# Altium PCB MB785.PCBDOC
Units mil, origin at the board's own origin, x right, y up, seen from the top; angles counter-clockwise.
Board outline 2195.55 x 3505 mil, 2 copper layers (TopLayer, BottomLayer); 22 components, 44 nets, 168 pads, 90 vias.
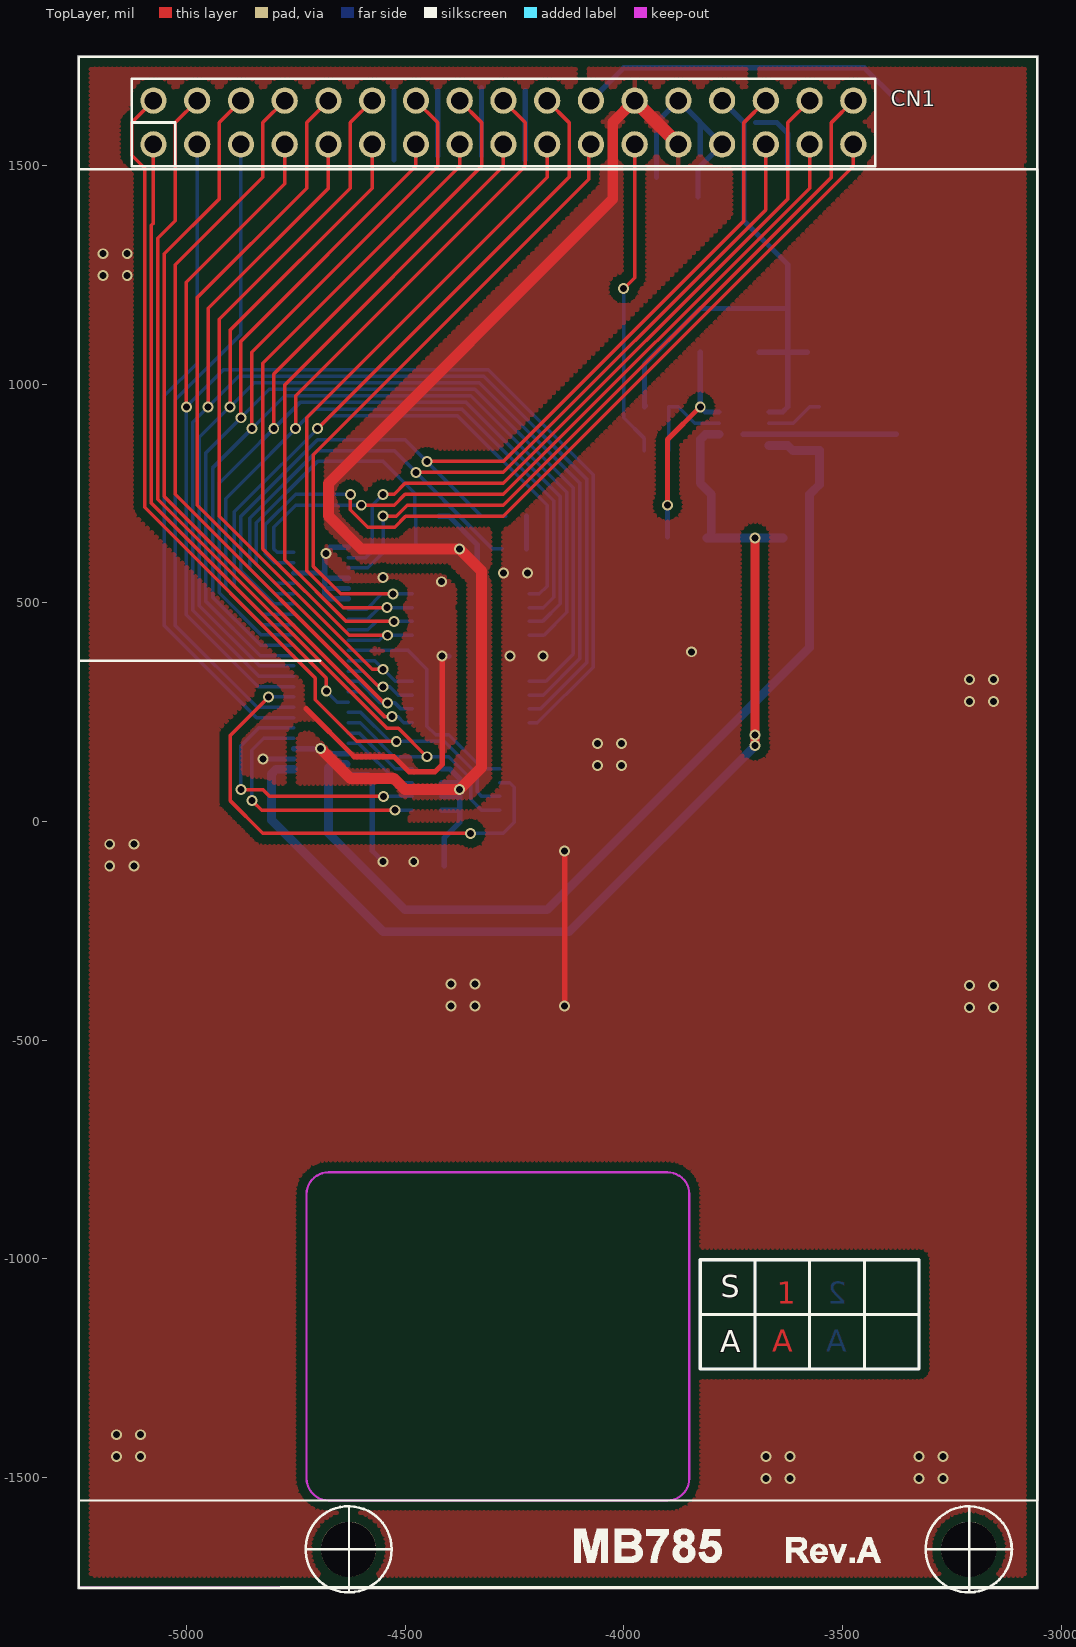
[diagram p0: TopLayer view]
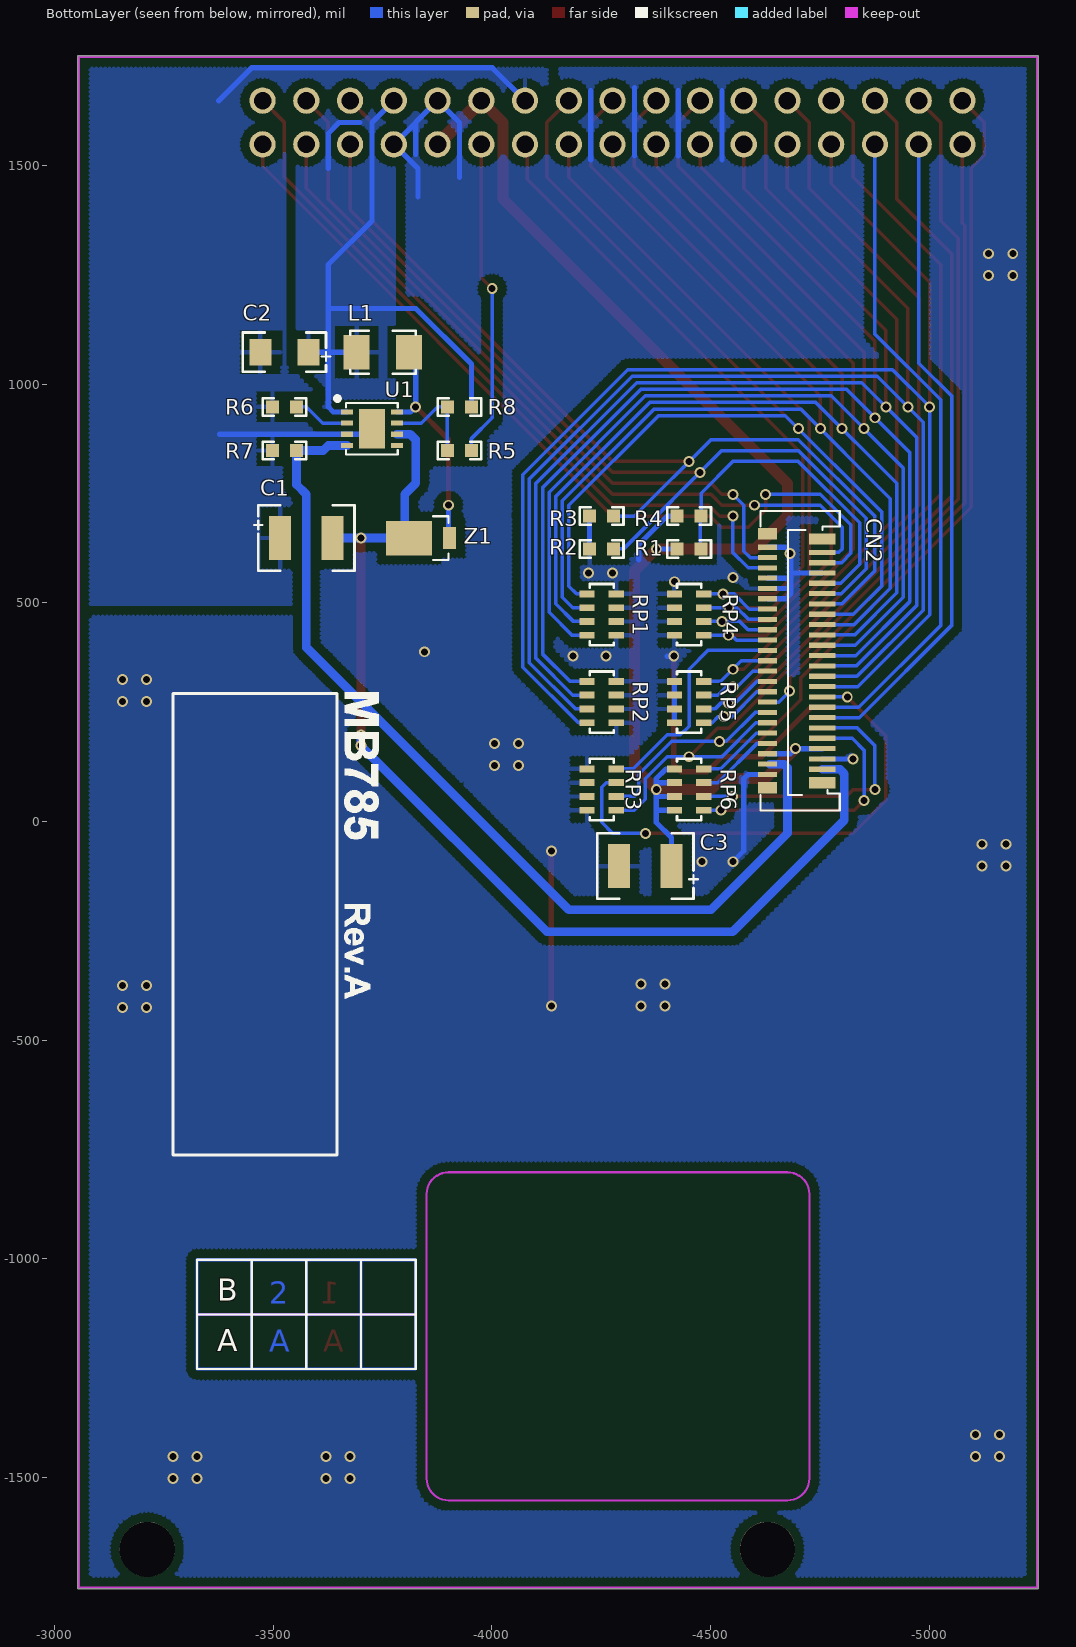
[diagram p1: BottomLayer view, seen from below]

## Layer stack, top to bottom
TopLayer: signal copper 1.4
Dielectric: core 12.6, FR-4, Dk 4.8
BottomLayer: signal copper 1.4

## Board outline
-5248.7,-1754.28 -3053.15,-1754.28 -3053.15,1750.72 -5248.7,1750.72

## Design rules (kind name [scope] priority, off if disabled: settings)
Clearance Clearance_1 [(InPoly)] p1: gap=20
Clearance [All] p2: gap=7
ComponentClearance [All] p1 off: gap=10 collisioncheckmode=0
PolygonConnect [All] p1: connectstyle=Relief reliefconductorwidth=10 reliefentries=4 polygonreliefangle="90 Angle"
RoutingLayers [All] p1: top layer=Horizontal bottom layer=Vertical
RoutingVias [All] p1: holewidth=16 width=25 viastyle="Through Hole" minholewidth=8 minwidth=16 maxholewidth=28 maxwidth=50
SolderMaskExpansion [All] p1: expansion=4
TestPointUsage [All] p1: valid=0 allowmultiple=FALSE
Testpoint [All] p1: side=15 testpointundercomponent=TRUE minsize=40 maxsize=100 preferedsize=60 minholesize=20 maxholesize=40 preferedholesize=32 testpointgrid=1 style=1023 order=1234567890
Width Width_3 [InNet('BLGND')] p1: maxlimit=300 minlimit=8 preferedwidth=12
Width Width_4 [InNet('BLVDD')] p2: maxlimit=300 minlimit=8 preferedwidth=12
Width Width_2 [InNet('VDD')] p3: maxlimit=300 minlimit=8 preferedwidth=8
Width Width_1 [InNet('GND')] p4: maxlimit=300 minlimit=8 preferedwidth=12
Width [All] p5: maxlimit=300 minlimit=7 preferedwidth=8
16 further rules are at their usual default settings.

## Components (designator, comment, footprint, x,y, rotation, side; value= is the part's Value field where it differs from the comment)
C1 "4.7uF/50V" TAN-B -3575.65,648.22 r0 bottom
C2 "2.2uF" TAN-A -3525.65,1073.22 r180 bottom
C3 "1uF/50V" TAN-B -4350.65,-101.78 r180 bottom
CN1 "3.2LCD_connector" 2*17P -5075.65,1548.22 r90 top
CN2 "FF0245SS1" FF0245SS1 -4692.54,367.51 r90 bottom locked
L1 "4.7uH(1A)" 3225 -3750.65,1073.22 r0 bottom
R1 "10K" 0603R -4450.65,623.22 r180 bottom
R2 "4K7" 0603R -4250.65,623.22 r0 bottom
R3 "4K7" 0603R -4250.65,698.22 r0 bottom
R4 "0" 0603R -4450.65,698.22 r180 bottom
R5 "0" 0603R -3925.65,848.22 r0 bottom
R6 "100K" 0603R -3525.65,948.22 r180 bottom
R7 "10" 0603R -3525.65,848.22 r0 bottom
R8 "do not fit" 0603R -3925.65,948.22 r0 bottom
RP1 "10K" RES4B#1 -4250.65,473.22 r270 bottom
RP2 "10K" RES4B#1 -4250.65,273.22 r270 bottom
RP3 "10K" RES4B#2 -4250.65,73.22 r270 bottom
RP4 "10K" RES4B#2 -4450.65,473.22 r270 bottom
RP5 "10K" RES4B#1 -4450.65,273.22 r90 bottom
RP6 "10K" RES4B#1 -4450.65,73.22 r90 bottom
U1 "STLD40DPMR" QFNT8 -3725.65,898.22 r270 bottom
Z1 "STPS1L40M" DO216AA -3875.65,648.22 r180 bottom

## Footprints (in the part's own frame and the unit in brackets; to place one, negate y for a bottom-side part, rotate by r counter-clockwise, add the part's x,y. Pads: shape width x height; smd on the part's side, far side on the other; paste and mask are expansions set on the pad)
2*17P [mil]
  round 60 hole 40: 1(0,0) 2(100,0) 3(0,-100) 4(100,-100) 5(0,-200) 6(100,-200) 7(0,-300) 8(100,-300) 9(0,-400) 10(100,-400) 11(0,-500) 12(100,-500) 13(0,-600) 14(100,-600) 15(0,-700) 16(100,-700) 17(0,-800) 18(100,-800) 19(0,-900) 20(100,-900) 21(0,-1000) 22(100,-1000) 23(0,-1100) 24(100,-1100) 25(0,-1200) 26(100,-1200) 27(0,-1300) 28(100,-1300) 29(0,-1400) 30(100,-1400) 31(0,-1500) 32(100,-1500) 33(0,-1600) 34(100,-1600)
  silkscreen extent -50,-1650 150,50
0603R [mil]
  rect 30x30 smd: 1(27.5,0) 2(-27.5,0)
  silkscreen extent -50,-20 50,20
3225 [mm]
  rect 1.5x2 smd: 1(1.524,0) 2(-1.524,0)
  silkscreen extent -1.91,-1.25 1.91,1.25
DO216AA [mil]
  rect 30x50 smd: 1(27.5,0)
  rect 105.12x78.74 smd: 2(-65.06,0)
  silkscreen extent -10,-50 25,50
FF0245SS1 [mm]
  rect 0.65x1.1 smd: 0(-7.375,1.59) 0(7.375,1.59)
  rect 0.65x1.54 smd: 0(-7.075,-1.59) 0(7.075,-1.59)
  rect 0.3x1.1 smd: 1(6.6,1.59) 3(6,1.59) 5(5.4,1.59) 7(4.8,1.59) 9(4.2,1.59) 11(3.6,1.59) 13(3,1.59) 15(2.4,1.59) 17(1.8,1.59) 19(1.2,1.59) 21(0.6,1.59) 23(0,1.59) 25(-0.6,1.59) 27(-1.2,1.59) 29(-1.8,1.59) 31(-2.4,1.59) 33(-3,1.59) 35(-3.6,1.59) 37(-4.2,1.59) 39(-4.8,1.59) 41(-5.4,1.59) 43(-6,1.59) 45(-6.6,1.59)
  rect 0.3x1.54 smd: 2(6.3,-1.59) 4(5.7,-1.59) 6(5.1,-1.59) 8(4.5,-1.59) 10(3.9,-1.59) 12(3.3,-1.59) 14(2.7,-1.59) 16(2.1,-1.59) 18(1.5,-1.59) 20(0.9,-1.59) 22(0.3,-1.59) 24(-0.3,-1.59) 26(-0.9,-1.59) 28(-1.5,-1.59) 30(-2.1,-1.59) 32(-2.7,-1.59) 34(-3.3,-1.59) 36(-3.9,-1.59) 38(-4.5,-1.59) 40(-5.1,-1.59) 42(-5.7,-1.59) 44(-6.3,-1.59)
  silkscreen extent -8.7,-2.6 8.7,2
QFNT8 [mm]
  rect 0.3x0.7 smd: 1(-0.975,-1.45) 2(-0.325,-1.45) 3(0.325,-1.45) 4(0.975,-1.45) 5(0.975,1.45) 6(0.325,1.45) 7(-0.325,1.45) 8(-0.975,1.45)
  rect 2.3x1.5 smd: ""(0,0)
  silkscreen extent -1.88,-2.13 1.5,1.5
RES4B#1 [mil]
  rect 15.75x35 smd: 1(-47.24,-33.5) 2(-47.24,33.5) 3(-15.75,-33.5) 4(-15.75,33.5) 5(15.75,-33.5) 6(15.75,33.5) 7(47.24,-33.5) 8(47.24,33.5)
  silkscreen extent -70,-28 70,28
RES4B#2 [mil]
  rect 15.75x35 smd: 1(-47.24,33.5) 2(-47.24,-33.5) 3(-15.75,33.5) 4(-15.75,-33.5) 5(15.75,33.5) 6(15.75,-33.5) 7(47.24,33.5) 8(47.24,-33.5)
  silkscreen extent -70,-28 70,28
TAN-A [mil]
  rect 50x60 smd: 1(55,0) 2(-55,0)
  silkscreen extent -95,-45 105,45
TAN-B [mil]
  rect 50x100 smd: 1(60,0) 2(-60,0)
  silkscreen extent -110,-75 120,75

## Free pads (board coordinates)
  round 125.98 hole 125.98 unplated: 0(-4629.65,-1663.72) 0(-3211.94,-1663.72)

## Via types
v1: diameter 25, hole 16, TopLayer to BottomLayer, tented both sides, 90 vias

## Nets (pads, with @x,y where several pads share a name; then routed paths per layer and width w, separated by ;. In a path a pad name is that pad's centre, name@x,y a point inside that pad or via, vN(x,y) a via of type N, cw(c..) or ccw(c..) an arc to the next point about the centre after c; other vN are vias at no path point)
#RESET: CN1.5 CN2.32 | length 1510.1
  BottomLayer w8: CN1.5 -4875.65,1114.23 -5025.65,964.23 -5025.65,448.22 -4838.65,261.21 CN2.32
A: C1.2 CN2.44 U1.6 Z1.2 | length 2505.3
  TopLayer w20: v1@-3700.65,174.09 v1(-3700.65,648.22)
  BottomLayer w12: v1(-3700.65,198.22) v1@-3700.22,197.78
  BottomLayer w20: CN2.44 -4795.65,119.48 -4805.65,109.48 -4805.65,3.22 -4550.65,-251.78 -4125.65,-251.78 v1(-3700.22,173.66) v1@-3700.22,197.78 ; Z1.2 C1.2 ; Z1.2@-3800.65,648.22 -3800.65,748.22 -3825.65,773.22 -3825.65,873.22 -3813.45,885.43 U1.6
BL_CONTROL: CN1.23 R5.2 | length 730
  TopLayer w8: v1(-4000.65,1218.22) -3975.65,1243.22 CN1.23
  BottomLayer w8: v1(-4000.65,1218.22) -4000.65,923.22 -3953.15,875.72 R5.2
BLGND: C1.1 C2.2 CN1.22 R6.2 R7.1 U1. U1.3 | length 1112.1
  BottomLayer w12: CN1.22 -4000.65,1723.22 -3450.65,1723.22 -3375.65,1648.22 ; U1.@-3727.86,885.43 -3377.86,885.43
BLVDD: C2.1 CN1.28 L1.1 R8.2 U1.1 | length 1564.5
  BottomLayer w12: R8.2@-3950.65,950.72 R8.2 -3953.15,1045.72 -3825.65,1173.22 -3625.65,1173.22 ; CN1.28 -3725.65,1598.22 -3725.65,1373.22 -3625.65,1273.22 -3625.65,948.22 -3637.27,936.61 U1.1 ; -3698.57,1598.22 -3650.65,1598.22 -3625.65,1573.22 -3625.65,1493.22 ; L1.1 C2.1
CS: CN1.1 CN2.31 | length 1478.9
  TopLayer w8: CN1.1 -5075.65,1368.22 -5080.65,1363.22 -5080.65,728.22 -4680.65,328.22 v1(-4680.65,298.22)
  BottomLayer w8: v1(-4680.65,298.22) -4655.46,273.02 CN2.31
DOTCLK: CN2.38 RP6.1 | length 601.4
  TopLayer w8: v1(-4850.65,48.22) -4828.41,25.98 v1(-4523.41,25.98) v1@-4526.16,23.22
  BottomLayer w8: v1(-4850.65,48.22) -4850.65,163.22 -4823.53,190.35 CN2.38 ; v1(-4523.41,25.98) RP6.1
ENABLE: CN2.39 RP6.5 | length 182.9
  BottomLayer w8: CN2.39 -4605.97,178.54 -4516.4,88.97 RP6.5
GND: C3.2 CN1.26 CN1.27 CN2.1 CN2.6 CN2.7 CN2.9 CN2.11 CN2.42 CN2.45 R2.1 R3.1 R4.2 RP1.2 RP1.4 RP1.6 RP1.8 RP2.2 RP2.4 RP2.6 RP2.8 RP3.2 RP3.4 RP3.6 RP3.8 RP4.2 RP4.4 RP4.6 RP4.8 RP5.2 RP5.4 RP5.6 RP5.8 | length 3208.8
  TopLayer w12: -4726.67,258.22 -4616.67,148.22 -4525.65,148.22 -4491.28,113.85 -4432.07,113.85 -4415.65,130.27 v1(-4415.65,378.22) ; v1(-4681.65,613.22) v1@-4675.65,613.22 ; v1(-4135.65,-421.78) v1(-4135.65,-66.78)
  BottomLayer w12: v1(-4825.65,143.22) -4825.54,143.1 CN2.42 ; CN2.6 -4684,568.3 -4683.92,568.22 ; -4683.92,556.49 CN2.7 ; -4678.57,532.87 CN2.9 ; CN2.45 -4585.1,107.67 -4575.65,98.22 -4575.65,-66.78 v1(-4550.65,-91.78) ; CN2.11 -4671.68,509.24 -4683.92,521.49 -4683.92,614.97 -4671.53,627.35 CN2.1 ; -4525.65,1513.22 -4525.65,1671.13 ; -4425.65,1522.12 -4425.65,1671.13 ; R4.2 -4400.65,698.22 -4335.65,633.22 -4335.65,598.22 ; RP5.2 RP5.8 ; v1(-4415.65,378.22) -4400.65,378.22 ; -4325.65,1522.12 -4325.65,1678.22 ; -4225.65,1513.22 -4225.65,1671.13 ; R2.1 R3.1 ; -3925.65,1473.22 -3925.65,1598.22 CN1.26 CN1.27 -3830.65,1493.22 -3830.65,1428.22 ; -3825.65,1525.31 -3825.65,1598.22
  other v1: -3675.65,-1501.78 -3620.65,-1501.78 -3325.65,-1501.78 -3270.65,-1501.78 -5160.65,-1451.78 -5105.65,-1451.78 -3675.65,-1451.78 -3620.65,-1451.78 -3325.65,-1451.78 -3270.65,-1451.78 -5160.65,-1401.78 -5105.65,-1401.78 -3210,-425 -3155,-425 -4395.65,-421.78 -4340.65,-421.78 -3210,-375 -3155,-375 -4395.65,-371.78 -4340.65,-371.78 -5175.65,-101.78 -5120.65,-101.78 -4480.65,-91.78 -5175.65,-51.78 -5120.65,-51.78 -4060.65,128.22 -4005.65,128.22 -4060.65,178.22 -4005.65,178.22 -3210,275 -3155,275 -3210,325 -3155,325 -4260.65,378.22 -4185.65,378.22 -3845.65,388.22 -4417.15,548.34 -4550.65,558.22 -4275.65,568.22 -4220.65,568.22 -5190.65,1248.22 -5135.65,1248.22 -5190.65,1298.22 -5135.65,1298.22
HSYNC: CN2.37 RP6.7 | length 179.6
  BottomLayer w8: CN2.37 -4604.59,202.16 -4522.9,120.46 RP6.7
K: CN2.43 R7.2 U1.4 | length 2193.9
  BottomLayer w20: CN2.43@-4635.65,131.29 -4667.58,131.29 -4675.65,123.22 -4675.65,-26.78 -4500.65,-201.78 -4175.65,-201.78 -3575.65,398.22 -3575.65,748.22 -3553.15,770.72 R7.2 -3614.04,848.22 -3625.65,859.84 U1.4
NetCN2_8: CN2.8 R1.1 R4.1 | length 774.1
  BottomLayer w8: CN2.8 -4797.11,544.68 -4840.65,588.22 -4840.65,683.22 -4700.65,823.22 -4550.65,823.22 -4478.15,750.72 R4.1 ; R1.1@-4475.65,625.72 R4.1@-4475.65,698.22
NetL1_2: L1.2 U1.8 Z1.1 | length 504.8
  TopLayer w12: v1(-3900.65,723.22) -3900.65,873.22 v1(-3825.65,948.22)
  BottomLayer w12: v1@-3903.15,720.72 v1(-3900.65,723.22) Z1.1@-3900.65,650.72 ; L1.2@-3825.65,1073.22 v1(-3825.65,948.22) -3814.04,936.61 U1.8
NetR5_1: R5.1 R8.1 U1.7 | length 230.8
  BottomLayer w8: R5.1 R8.1 -3875.65,948.22 -3838.45,911.02 U1.7
NetR6_1: R6.1 U1.2 | length 130.8
  BottomLayer w8: U1.2 -3612.86,911.02 -3575.65,948.22 R6.1
PD0: CN2.30 RP3.3 | length 1139.7
  TopLayer w8: v1(-4812.27,284.84) -4900.65,196.45 -4900.65,48.22 -4825.65,-26.78 v1(-4350.65,-26.78)
  BottomLayer w8: v1(-4812.27,284.84) CN2.30 ; v1(-4350.65,-26.78) -4275.65,-26.78 -4250.65,-1.78 -4250.65,78.22 -4261.4,88.97 RP3.3
PD1: CN1.6 CN2.29 RP5.1 | length 1880.9
  TopLayer w8: CN1.6 -4925.65,1598.22 -4925.65,1423.22 -5050.65,1298.22 -5050.65,743.22 -4547.65,240.22 v1(-4530.65,240.22)
  BottomLayer w8: CN2.29 -4605.65,296.65 -4549.23,240.22 -4517.65,240.22 -4503.41,225.98 RP5.1
PD2: CN1.7 CN2.28 RP2.7 | length 3186.1
  TopLayer w8: v1(-5000.65,948.22) -5000.65,1233.22 -4775.65,1458.22 CN1.7
  BottomLayer w8: CN2.28@-4755.38,308.22 CN2.28 -4835.89,308.46 -5000.65,473.22 v1(-5000.65,948.22) -4915.65,1033.22 -4310.65,1033.22 -4070.65,793.22 -4070.65,353.22 -4197.9,225.98 RP2.7
PD3: CN1.8 CN2.27 RP5.3 | length 1857.9
  TopLayer w8: CN1.8 -4825.65,1598.22 -4825.65,1473.22 -5025.65,1273.22 -5025.65,748.22 -4548.65,271.22 v1(-4540.65,271.22)
  BottomLayer w8: CN2.27 -4605.65,320.27 -4556.61,271.22 -4523.65,271.22 -4509.9,257.47 RP5.3
PD4: CN1.9 CN2.26 RP2.5 | length 3073.2
  TopLayer w8: v1(-4950.65,948.22) -4950.65,1173.22 -4675.65,1448.22 CN1.9
  BottomLayer w8: CN2.26 -4834.51,332.08 -4985.65,483.22 -4985.65,913.22 -4880.65,1018.22 -4320.65,1018.22 -4085.65,783.22 -4085.65,363.22 -4191.4,257.47 RP2.5
PD5: CN1.10 CN2.25 RP5.5 | length 1814.7
  TopLayer w8: CN1.10 -4725.65,1598.22 -4725.65,1448.22 -4975.65,1198.22 -4975.65,723.22 -4560.65,308.22 v1(-4550.65,308.22)
  BottomLayer w8: CN2.25 -4596.32,343.89 -4560.65,308.22 -4535.65,308.22 -4516.4,288.97 RP5.5
PD6: CN1.11 CN2.24 RP2.3 | length 2960.5
  TopLayer w8: v1(-4900.65,948.22) -4900.65,1123.22 -4575.65,1448.22 CN1.11
  BottomLayer w8: CN2.24 -4833.13,355.7 -4970.65,493.22 -4970.65,878.22 -4845.65,1003.22 -4330.65,1003.22 -4100.65,773.22 -4100.65,373.22 -4184.9,288.97 RP2.3
PD7: CN1.12 CN2.23 RP5.7 | length 1780.2
  TopLayer w8: CN1.12 -4625.65,1598.22 -4625.65,1448.22 -4925.65,1148.22 -4925.65,698.22 -4575.65,348.22 v1(-4550.65,348.22)
  BottomLayer w8: CN2.23 -4569.94,367.51 -4522.9,320.46 RP5.7
PD8: CN1.13 CN2.22 RP2.1 | length 2883.3
  TopLayer w8: v1(-4875.65,923.22) -4875.65,1098.22 -4475.65,1498.22 CN1.13
  BottomLayer w8: CN2.22 -4831.76,379.32 -4955.65,503.22 -4955.65,843.22 -4810.65,988.22 -4340.65,988.22 -4115.65,763.22 -4115.65,383.22 -4178.41,320.47 RP2.1
PD9: CN2.21 RP3.1 | length 534.1
  BottomLayer w8: CN2.21 -4493.57,391.13 -4450.65,348.22 -4450.65,218.22 -4430.65,198.22 -4400.65,198.22 -4322.9,120.47 RP3.1
PD10: CN1.14 CN2.20 RP1.7 | length 2825.9
  TopLayer w8: v1(-4850.65,898.22) -4850.65,1073.22 -4425.65,1498.22 -4425.65,1598.22 CN1.14
  BottomLayer w8: CN2.20@-4755.42,403.22 CN2.20 -4830.38,402.95 -4940.65,513.22 -4940.65,808.22 -4775.65,973.22 -4350.65,973.22 -4130.65,753.22 -4130.65,478.22 -4182.9,425.98 RP1.7
PD11: CN1.15 CN2.19 RP4.7 | length 1628.5
  TopLayer w8: v1(-4540.65,425.98) -4628.41,425.98 -4825.65,623.22 -4825.65,1048.22 -4375.65,1498.22 CN1.15
  BottomLayer w8: CN2.19 -4559.12,414.76 -4547.9,425.98 RP4.7
PD12: CN1.16 CN2.18 RP1.5 | length 2707.1
  TopLayer w8: v1(-4800.65,898.22) -4800.65,1023.22 -4325.65,1498.22 -4325.65,1598.22 CN1.16
  BottomLayer w8: CN2.18 -4829,426.57 -4925.65,523.22 -4925.65,773.22 -4740.65,958.22 -4360.65,958.22 -4145.65,743.22 -4145.65,498.22 -4186.4,457.47 RP1.5
PD13: CN1.17 CN2.17 RP4.5 | length 1619.1
  TopLayer w8: v1(-4525.65,457.47) -4634.91,457.47 -4775.65,598.22 -4775.65,998.22 -4275.65,1498.22 CN1.17
  BottomLayer w8: CN2.17 -4585.5,438.38 -4566.4,457.47 RP4.5
PD14: CN1.18 CN2.16 RP1.3 | length 2591.5
  TopLayer w8: v1(-4750.65,898.22) -4750.65,973.22 -4225.65,1498.22 -4225.65,1598.22 CN1.18
  BottomLayer w8: CN2.16 -4827.62,450.19 -4910.65,533.22 -4910.65,738.22 -4705.65,943.22 -4370.65,943.22 -4160.65,733.22 -4160.65,513.22 -4184.9,488.97 RP1.3
PD15: CN1.19 CN2.15 RP4.3 | length 1578.9
  TopLayer w8: v1(-4541.4,488.97) -4641.4,488.97 -4725.65,573.22 -4725.65,923.22 -4175.65,1473.22 CN1.19
  BottomLayer w8: CN2.15 -4586.87,462 -4559.9,488.97 RP4.3
PD16: CN1.20 CN2.14 RP1.1 | length 2466
  TopLayer w8: v1(-4700.65,898.22) -4125.65,1473.22 -4125.65,1598.22 CN1.20
  BottomLayer w8: CN2.14 -4826.24,473.81 -4890.65,538.22 -4890.65,708.22 -4670.65,928.22 -4380.65,928.22 -4175.65,723.22 -4175.65,538.22 -4193.41,520.47 RP1.1
PD17: CN1.21 CN2.13 RP4.1 | length 1608.8
  TopLayer w8: v1@-4530.65,523.22 v1(-4527.9,520.47) -4647.9,520.47 -4710.65,583.22 -4710.65,838.22 -4080.65,1468.22 CN1.21@-4080.65,1558.22
  BottomLayer w8: CN2.13 -4588.25,485.62 -4553.41,520.47 RP4.1
RD: CN1.4 CN2.35 RP3.7 | length 2263.8
  TopLayer w8: CN1.4 -5025.65,1598.22 -5025.65,1373.22 -5065.65,1333.22 -5065.65,737.01 -4541.87,213.22 -4515.65,213.22 v1(-4450.65,148.22)
  BottomLayer w8: CN2.35 -4603.21,225.78 -4526.04,148.61 -4451.04,148.61 v1(-4450.65,148.22) ; v1@-4450.65,148.61 -4401.04,148.61 -4350.65,98.22 -4350.65,50.98 -4325.65,25.98 RP3.7
RS: CN1.2 CN2.33 RP3.5 | length 2237.8
  TopLayer w8: CN1.2 -5125.65,1598.22 -5125.65,1523.22 -5095.65,1493.22 -5095.65,718.22 -4705.65,328.22 -4705.65,278.22 -4610.65,183.22 v1(-4520.65,183.22)
  BottomLayer w8: CN2.33 -4601.83,249.4 -4535.65,183.22 -4410.65,183.22 -4335.65,108.22 -4335.65,68.22 -4324.91,57.47 RP3.5
SDI: CN1.30 CN2.12 R3.2 | length 2275.4
  TopLayer w8: v1(-4450.65,823.22) -4275.65,823.22 -3725.65,1373.22 -3725.65,1598.22 CN1.30
  BottomLayer w8: CN2.12 -4799.87,497.43 -4875.65,573.22 -4875.65,698.22 -4700.65,873.22 -4500.65,873.22 -4325.65,698.22 R3.2@-4270.65,698.22
SDO: CN1.29 CN2.10 R2.2 | length 2172.6
  TopLayer w8: v1(-4475.65,798.22) -4275.65,798.22 -3675.65,1398.22 CN1.29
  BottomLayer w8: CN2.10 -4798.49,521.06 -4855.65,578.22 -4855.65,693.22 -4700.65,848.22 -4525.65,848.22 -4300.65,623.22 R2.2
VDD: C3.1 CN1.24 CN1.25 CN2.40 CN2.41 R1.2 RP6.2 RP6.4 RP6.6 RP6.8 | length 3224.7
  TopLayer w25: v1(-4694.16,166.72) -4625.65,98.22 -4525.65,98.22 -4500.65,73.22 v1(-4375.65,73.22) -4325.65,123.22 -4325.65,573.22 v1(-4375.65,623.22) -4600.65,623.22 -4675.65,698.22 -4675.65,773.22 -4025.65,1423.22 -4025.65,1598.22 CN1.24
  TopLayer w30: CN1.24 CN1.25
  BottomLayer w12: CN2.40 v1(-4694.16,166.72) -4682.35,154.91 CN2.41 ; R1.2 v1(-4375.65,623.22) ; RP6.2 -4377.9,25.98 ; RP6.4 -4376.4,57.47 ; RP6.6 -4376.4,88.97 ; RP6.8 -4397.9,120.46 -4375.65,98.22 -4375.65,-1.78 -4410.65,-36.78 C3.1
VSYNC: CN2.36 RP6.3 | length 635.4
  TopLayer w8: v1(-4875.65,73.22) -4825.65,73.22 -4809.9,57.47 v1(-4549.9,57.47)
  BottomLayer w8: v1(-4875.65,73.22) -4875.65,173.22 -4834.9,213.97 CN2.36 ; v1(-4549.9,57.47) RP6.3
WR: CN1.3 CN2.34 | length 1513.8
  BottomLayer w8: CN1.3 -4975.65,1048.22 -5050.65,973.22 -5050.65,448.22 -4840.02,237.59 CN2.34
XL: CN1.31 CN2.2 | length 1744.7
  TopLayer w8: v1(-4600.65,723.22) -4525.65,723.22 -4500.65,748.22 -4275.65,748.22 -3575.65,1448.22 CN1.31
  BottomLayer w8: CN2.2 -4792.98,615.54 -4800.65,623.22 -4800.65,673.22 -4750.65,723.22 v1(-4600.65,723.22)
XR: CN1.32 CN2.3 | length 1651.7
  TopLayer w8: v1(-4550.65,748.22) -4525.65,748.22 -4500.65,773.22 -4275.65,773.22 -3625.65,1423.22 -3625.65,1598.22 CN1.32
  BottomLayer w8: CN2.3@-4630.46,603.22 CN2.3 -4590.14,603.73 -4575.65,618.22 -4575.65,723.22 v1(-4550.65,748.22)
YD: CN1.33 CN2.4 | length 1956.6
  TopLayer w8: v1(-4625.65,748.22) -4625.65,713.22 -4585.65,673.22 -4524.44,673.22 -4499.44,698.22 -4275.65,698.22 -3475.65,1498.22 CN1.33
  BottomLayer w8: CN2.4 -4799.35,591.92 -4820.65,613.22 -4820.65,678.22 -4750.65,748.22 v1(-4625.65,748.22)
YU: CN1.34 CN2.5 | length 1718.6
  TopLayer w8: v1(-4550.65,698.22) -4520.65,698.22 -4495.65,723.22 -4275.65,723.22 -3525.65,1473.22 -3525.65,1598.22 CN1.34
  BottomLayer w8: CN2.5 -4585.65,580.11 -4550.65,615.11 v1(-4550.65,698.22)
pads on no net: CN2.0 U1.5
copper on no net: | length 5515
  TopLayer w5: -3825.65,-1236.78 -3825.65,-1251.78 ; -3825.65,-1126.78 -3325.65,-1126.78 ; -3700.65,-1251.78 -3700.65,-1226.78 -3700.65,-1001.78 ; -3575.65,-1251.78 -3575.65,-1001.78 ; -3450.65,-1251.78 -3450.65,-1001.78 ; -3825.65,-1251.78 -3325.65,-1251.78 -3325.65,-1226.78 -3325.65,-1001.78 -3700.65,-1001.78 ; -3825.65,-1251.78 -3825.65,-1226.78 -3825.65,-1001.78 -3700.65,-1001.78
  BottomLayer w7: -3825.65,-1126.78 -3700.65,-1126.78 ; -3700.65,-1251.78 -3700.65,-1126.78 ; -3575.65,-1251.78 -3575.65,-1126.78 -3575.65,-1001.78 ; -3450.65,-1251.78 -3450.65,-1126.78 -3450.65,-1001.78 ; -3700.65,-1126.78 -3325.65,-1126.78 ; -3700.65,-1126.78 -3700.65,-1001.78 ; -3700.65,-1001.78 -3325.65,-1001.78 -3325.65,-1126.78 ; -3700.65,-1001.78 -3825.65,-1001.78 -3825.65,-1251.78 -3325.65,-1251.78 -3325.65,-1126.78

## Polygon pours and split planes (outlines as drawn)
GND on TopLayer (hatched 90Degree grid 10 track 10, remove dead copper): -5246.2,-1751.78 -5246.2,1748.22 -3055.65,1748.22 -3055.65,-1751.78
VDD on TopLayer (hatched 90Degree grid 10 track 10, remove dead copper): -4745.65,73.22 -4745.65,193.22 -4735.65,203.22 -4695.65,203.22 -4620.65,128.22 -4400.65,128.22 -4355.65,173.22 -4355.65,548.22 -4400.65,593.22 -4600.65,593.22 -4700.65,693.22 -4700.65,838.22 -4080.65,1458.22 -4080.65,1743.22 -3720.65,1743.22 -3720.65,1398.22 -4305.65,813.22 -4305.65,98.22 -4350.65,53.22 -4725.65,53.22
GND on BottomLayer (hatched 90Degree grid 10 track 10, remove dead copper): -5245.65,-1751.78 -5245.65,1748.22 -3055.65,1748.22 -3055.65,-1751.78
BLVDD on BottomLayer (hatched 90Degree grid 10 track 10, remove dead copper): -3535.65,998.22 -3535.65,1698.22 -3825.65,1698.22 -3825.65,1598.22 -3775.65,1548.22 -3775.65,923.22 -3575.65,923.22 -3535.65,963.22
BLGND on BottomLayer (hatched 90Degree grid 10 track 10, remove dead copper): -3600.65,598.22 -3600.65,973.22 -3525.65,1048.22 -3525.65,1673.22 -3980.65,1673.22 -3980.65,1598.22 -4125.65,1598.22 -4125.65,1748.22 -3055.65,1748.22 -3055.65,498.22 -3600.65,498.22

## Keep-outs
KeepOutLayer:
  lines w4: -3825.65,-1126.78 -3700.65,-1126.78 ; -3575.65,-1251.78 -3575.65,-1126.78 -3575.65,-1001.78 ; -3450.65,-1251.78 -3450.65,-1126.78 -3450.65,-1001.78 ; -3700.65,-1251.78 -3700.65,-1126.78 ; -3700.65,-1251.78 -3325.65,-1251.78 -3325.65,-1126.78 ; -3700.65,-1251.78 -3825.65,-1251.78 -3825.65,-1001.78 -3700.65,-1001.78 ; -3700.65,-1126.78 -3325.65,-1126.78 ; -3700.65,-1126.78 -3700.65,-1001.78 ; -3700.65,-1001.78 -3325.65,-1001.78 -3325.65,-1126.78
  lines w5: -4785.94,-1751.78 -3055.65,-1751.78 ; -3055.65,1553.31 -3055.65,-1751.78 ; -3055.65,-1751.78 -3055.65,1748.22 -5246.2,1748.22 -5246.2,-1751.78 -3055.65,-1751.78 ; -4725.65,-1501.78 ccw(c-4675.65,-1501.78) -4675.65,-1551.78 -3900.65,-1551.78 ccw(c-3900.65,-1501.78) -3850.65,-1501.78 -3850.65,-851.78 ccw(c-3900.65,-851.78) -3900.65,-801.78 -4675.65,-801.78 ccw(c-4675.65,-851.78) -4725.65,-851.78 -4725.65,-1501.78

## Other copper
TopLayer:
  text "1" at -3650.65,-1101.78 h50
  text "A" at -3660.65,-1211.78 h50
BottomLayer:
  text "2" at -3490.65,-1101.78 h50
  text "A" at -3490.65,-1211.78 h50

## Silkscreen, mask and mechanical layers (free items; w line width, h text height)
TopOverlay:
  drawing of 1017 lines, arcs and shapes, not listed
  text "S" at -3778.65,-1087.78 h50
  text "A" at -3779.65,-1212.78 h50
BottomOverlay:
  drawing of 1004 lines, arcs and shapes, not listed
  text "B" at -3371.65,-1095.78 h50
  text "A" at -3371.65,-1210.78 h50
Mechanical1:
  lines w5: -5245.65,1748.22 -3055.65,1748.22 ; -4785.94,-1751.78 -3055.65,-1751.78 ; -3055.65,1553.31 -3055.65,-1751.78 ; -3055.1,-1551.78 -3055.1,1491.53 ; -3055.65,-1751.78 -3055.65,1748.22 ; -3055.65,-1751.78 -3055.65,1748.22 ; -3055.65,-1751.78 -5246.2,-1751.78 -5246.2,1748.22 -3055.65,1748.22 ; -4725.65,-1501.78 ccw(c-4675.65,-1501.78) -4675.65,-1551.78 -3900.65,-1551.78 ccw(c-3900.65,-1501.78) -3850.65,-1501.78 -3850.65,-851.78 ccw(c-3900.65,-851.78) -3900.65,-801.78 -4675.65,-801.78 ccw(c-4675.65,-851.78) -4725.65,-851.78 -4725.65,-1501.78